# Altium PCB LDO.PcbDoc
Units mil, origin at the board's own origin, x right, y up, seen from the top; angles counter-clockwise.
Board outline 6000 x 4000 mil, 2 copper layers (Top Layer, Bottom Layer); 46 components, 25 nets, 207 pads, 11 vias.
Unrouted connection lines stored in the file: 2.
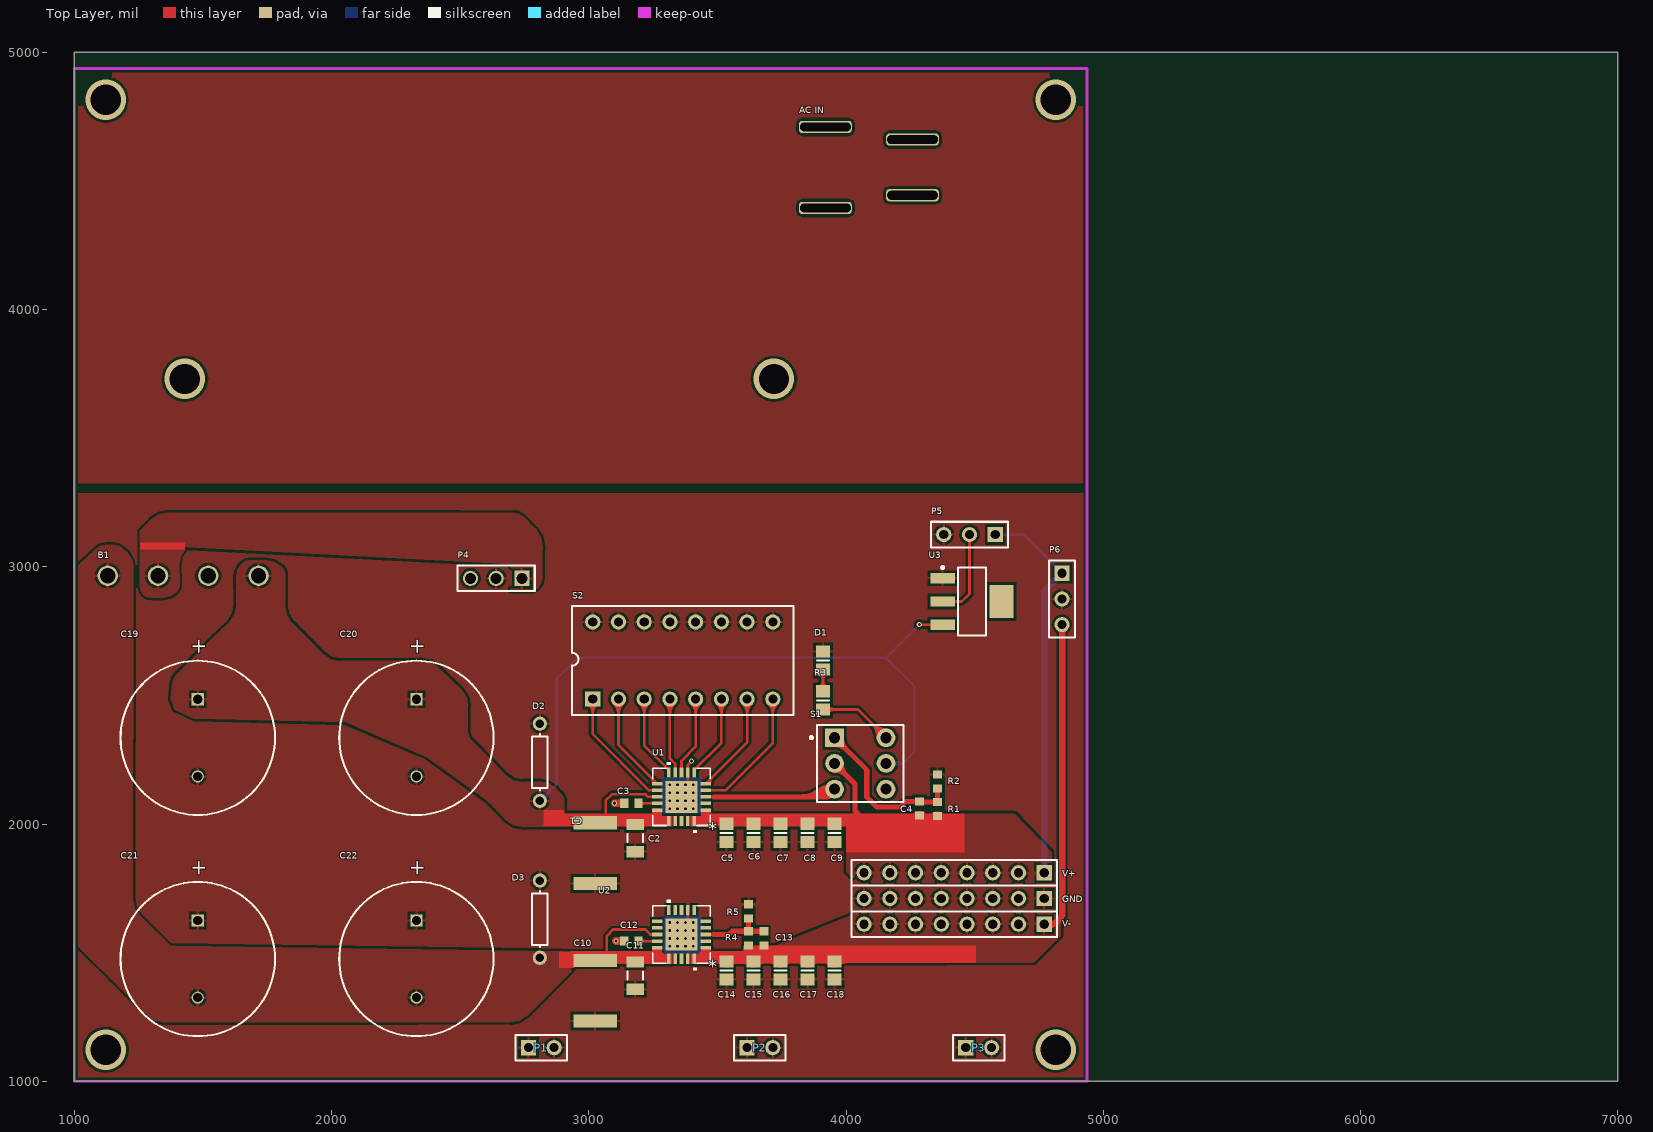
[diagram p0: Top Layer view]
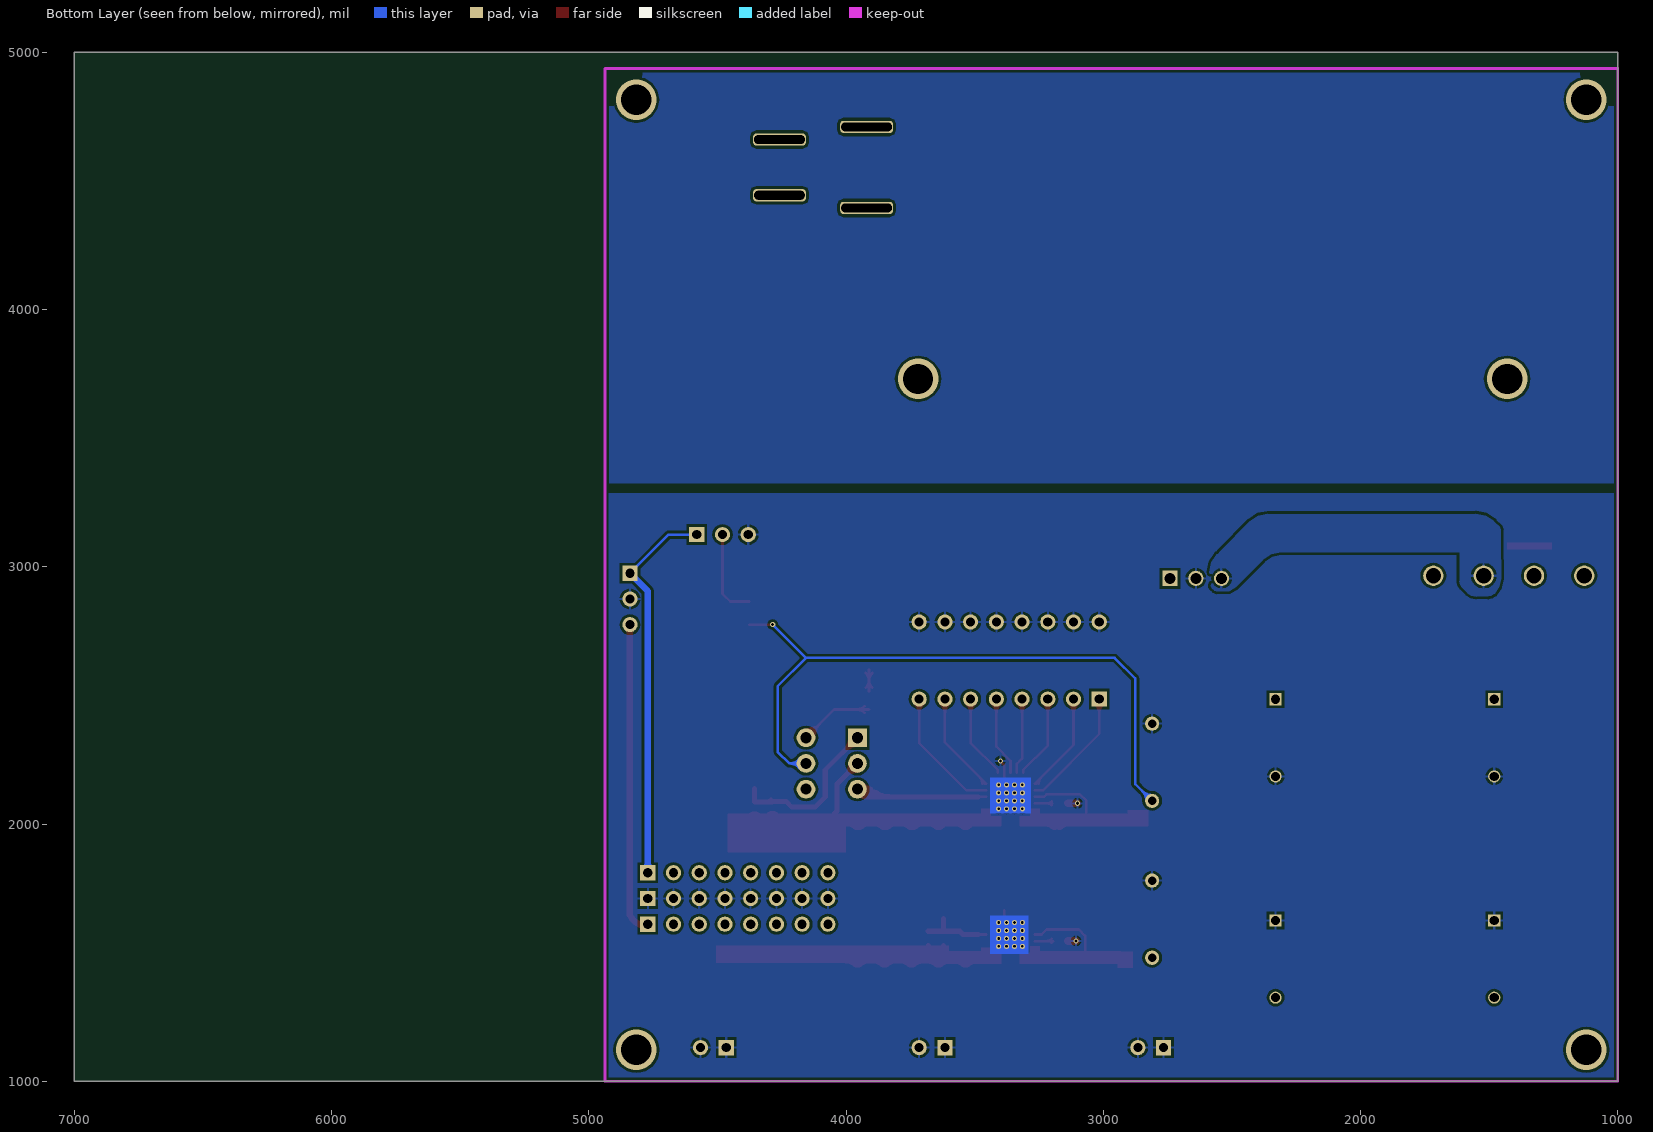
[diagram p1: Bottom Layer view, seen from below]

## Layer stack, top to bottom
Top Layer: signal copper 1.4
Dielectric: dielectric 12.6, FR-4, Dk 4.8
Bottom Layer: signal copper 1.4

## Board outline
1000,1000 7000,1000 7000,5000 1000,5000

## Design rules (kind name [scope] priority, off if disabled: settings)
Clearance [All] p1: gap=10
PolygonConnect [All] p1: connectstyle=Relief reliefconductorwidth=10 reliefentries=4 polygonreliefangle="90 Angle" airgapwidth=10
RoutingVias [All] p1: holewidth=28 width=50 viastyle="Through Hole" minholewidth=28 minwidth=50 maxholewidth=28 maxwidth=50
SolderMaskExpansion [All] p1: expansion=4
Width [All] p1: maxlimit=10 minlimit=10 preferedwidth=10
28 further rules are at their usual default settings.

## Components (designator, comment, footprint, x,y, rotation, side; value= is the part's Value field where it differs from the comment)
"AC IN" "SW AC 250V 6A" "SW AC 250V 6A" 3920,4710 r0 top
B1 "Diode Bridge" "Diode Bridge" 1130,2965 r0 top
C1 "Tantalum" "D 7343-31" 3025,2005 r270 top
C2 "X5R 50V" C1206 3180.5,1945.5 r90 top
C3 "X5R 50V" 1608[0603] 3165.5,2080.5 r0 top
C4 "X7R 25V" 1608[0603] 4285.5,2060.5 r270 top
C5 "X5R 35V" 6-0805_N 3535.5,1965.5 r90 top
C6 "X5R 35V" 6-0805_N 3640.5,1965.5 r90 top
C7 "X5R 35V" 6-0805_N 3745.5,1965.5 r90 top
C8 "X5R 35V" 6-0805_N 3850.5,1965.5 r90 top
C9 "X5R 35V" 6-0805_N 3955.5,1965.5 r90 top
C10 "Tantalum" "D 7343-31" 3025,1470 r270 top
C11 "X5R 50V" C1206 3180.5,1410.5 r90 top
C12 "X5R 50V" 1608[0603] 3165.5,1545.5 r0 top
C13 "X7R 25V" 1608[0603] 3680.5,1555.5 r270 top
C14 "X5R 35V" 6-0805_N 3535.5,1430.5 r90 top
C15 "X5R 35V" 6-0805_N 3640.5,1430.5 r90 top
C16 "X5R 35V" 6-0805_N 3745.5,1430.5 r90 top
C17 "X5R 35V" 6-0805_N 3850.5,1430.5 r90 top
C18 "X5R 35V" 6-0805_N 3955.5,1430.5 r90 top
C19 "Cap Pol1" RB7.6-15 1480,2335 r90 top
C20 "Cap Pol1" RB7.6-15 2330,2335 r90 top
C21 "Cap Pol1" RB7.6-15 1480,1475 r90 top
C22 "Cap Pol1" RB7.6-15 2330,1475 r90 top
D1 "LED2" 6-0805_N 3910.5,2635.5 r90 top
D2 "D Zener" AXIAL-0.3 2810,2240 r270 top
D3 "D Zener" AXIAL-0.3 2810,1630 r90 top
GND "Header 8" HDR1X8 4770.5,1710.5 r180 top
P1 "Header 2" HDR1X2 2765.5,1130.5 r0 top
P2 "Header 2" HDR1X2 3615.5,1130.5 r0 top
P3 "Header 2" HDR1X2 4465.5,1130.5 r0 top
P4 "Header 3" HDR1X3#1 2740,2955 r180 top
P5 "Header 3" HDR1X3#2 4580,3125 r180 top
P6 "Header 3" HDR1X3#2 4840,2975 r270 top
R1 "1/10W 1%" 1608[0603] 4355.5,2057.94 r270 top
R2 "1/10W 1%" 1608[0603] 4355.5,2165.5 r270 top
R3 "Res1" 6-0805_N 3910.5,2480.5 r270 top
R4 "1/10W 1%" 1608[0603] 3620.5,1555.5 r270 top
R5 "1/10W 1%" 1608[0603] 3620.5,1660.5 r270 top
S1 "SW  Press" "SW Press" 4055.5,2235.5 r0 top
S2 "SW-DIP8" DIP-16-KEY 3015.5,2485.5 r0 top
U1 "TPS7A4701" "RGW 5×5 QFN-20" 3360.5,2105.5 r180 top
U2 "TPS7A3301" "RGW 5×5 QFN-20" 3360.5,1570.5 r180 top
U3 "AMS1117" SOT223_N 4490,2865 r0 top
V+ "Header 8" HDR1X8 4770.5,1810.5 r180 top
V- "Header 8" HDR1X8 4770.5,1610.5 r180 top

## Footprints (in the part's own frame and the unit in brackets; to place one, negate y for a bottom-side part, rotate by r counter-clockwise, add the part's x,y. Pads: shape width x height; smd on the part's side, far side on the other; paste and mask are expansions set on the pad)
6-0805_N [mm] "Chip Resistor, Body 2.0x1.2mm, IPC Medium Density"
  rect 1.2x1.4 smd: 1(-0.9,0) 2(0.9,0)
  silkscreen extent 0,-0.6 0,0.6, body extent -1.07,-0.7 1.07,0.7, height 0.7
1608[0603] [mm] "Chip Capacitor, Body 1.6x0.8mm, IPC High Density"
  rect 0.8x0.9 smd: 1(-0.7,0) 2(0.7,0)
  body extent -0.87,-0.48 0.87,0.48, height 1.3
AXIAL-0.3 [mm] "Axial Device, Thru-Hole; 2 Leads; 0.3 in Pin Spacing"
  round 1.4 hole 0.85: 1(-3.81,0) 2(3.81,0)
  silkscreen extent -2.77,-0.76 2.77,0.76
C1206 [mm] "Chip Capacitor, Body 3.2x1.6mm, IPC High Density"
  rect 1.1x1.7 smd: 1(-1.35,0) 2(1.35,0)
  silkscreen extent -0.4,-0.75 0.4,0.75, body extent -1.7,-0.9 1.7,0.9, height 1.3
"D 7343-31" [mm]
  rect 1.3x4.3 smd: 1(0,0) 2(6,0)
"Diode Bridge" [mm]
  round 2 hole 1.5: 1(0,0) 2(4.96,0) 3(9.93,0) 4(14.9,0)
DIP-16-KEY [mm] "DIP; 16 Leads; Row Spacing 7.62 mm; Pitch 2.54 mm"
  rect 1.5x1.5 hole 0.9: 1(0,0)
  round 1.5 hole 0.9: 2(2.54,0) 3(5.08,0) 4(7.62,0) 5(10.16,0) 6(12.7,0) 7(15.24,0) 8(17.78,0) 9(17.78,7.62) 10(15.24,7.62) 11(12.7,7.62) 12(10.16,7.62) 13(7.62,7.62) 14(5.08,7.62) 15(2.54,7.62) 16(0,7.62)
  silkscreen extent -2.05,-1.59 19.83,9.2
HDR1X2 [mm] "Connector; Header; 2 Position"
  rect 1.5x1.5 hole 0.9: 1(0,0)
  round 1.5 hole 0.9: 2(2.54,0)
  silkscreen extent -1.27,-1.27 3.81,1.27
HDR1X3#1 [mm] "Connector; Header; 3 Position"
  rect 1.5x1.5 hole 1.1: 1(0,0)
  round 1.5 hole 1.1: 2(2.54,0) 3(5.08,0)
  silkscreen extent -1.27,-1.27 6.35,1.27
HDR1X3#2 [mm] "Connector; Header; 3 Position"
  rect 1.5x1.5 hole 0.9: 1(0,0)
  round 1.5 hole 0.9: 2(2.54,0) 3(5.08,0)
  silkscreen extent -1.27,-1.27 6.35,1.27
HDR1X8 [mm] "Connector; Header; 8 Position"
  rect 1.5x1.5 hole 0.9: 1(0,0)
  round 1.5 hole 0.9: 2(2.54,0) 3(5.08,0) 4(7.62,0) 5(10.16,0) 6(12.7,0) 7(15.24,0) 8(17.78,0)
  silkscreen extent -1.27,-1.27 19.05,1.27
RB7.6-15 [mm] "Polarized Capacitor (Radial); 2 Leads"
  rect 1.2x1.2 hole 0.9: 1(3.81,0)
  round 1.2 hole 0.9: 2(-3.81,0)
  silkscreen extent -7.62,-7.62 7.62,7.62
"RGW 5×5 QFN-20" [mil]
  rect 39.37x13.78 smd paste-6.89: 1(-94.49,51.18) 2(-94.49,25.59) 3(-94.49,0) 4(-94.49,-25.59) 5(-94.49,-51.18) 11(94.49,-51.18) 12(94.49,-25.59) 13(94.49,0) 14(94.49,25.59) 15(94.49,51.18)
  rect 13.78x39.37 smd paste-6.89: 6(-49.38,-94.49) 7(-24.69,-94.49) 8(0,-94.49) 9(24.69,-94.49) 10(49.38,-94.49) 16(49.38,94.49) 17(24.69,94.49) 18(0,94.49) 19(-24.69,94.49) 20(-49.38,94.49)
  rect 124.02x124.02 smd paste-62.01: 21(0,0)
  round 20 / inner round 60 / far side round 20 hole 10: V(46.5,46.5) V_2(-46.5,-15.5) V_3(-46.5,-46.5) V_4(-46.5,15.5) V_5(-46.5,46.5) V_6(-15.5,-46.5) V_7(-15.5,-15.5) V_8(-15.5,15.5) V_9(-15.5,46.5) V_10(15.5,-46.5) V_11(15.5,-15.5) V_12(15.5,15.5) V_13(15.5,46.5) V_14(46.5,-46.5) V_15(46.5,-15.5) V_16(46.5,15.5)
  silkscreen extent -111,-134 111,140
SOT223_N [mm]
  rect 2.4x1 smd: 1(-2.9,2.3) 2(-2.9,0) 3(-2.9,-2.3)
  rect 2.4x3.3 smd: 4(2.9,0)
  silkscreen extent -3.02,-3.35 1.4,3.47, body extent -1.85,-3.35 1.85,3.35, height 1.7
"SW AC 250V 6A" [mm]
  rrect50% 5.2x1.2 hole 0.862 slot 5 at 0 deg: 1(0,0) 2(0,-8) 3(8.6,-6.75) 4(8.6,-1.25)
"SW Press" [mm]
  rect 1.85x1.85 hole 1.1: 1(-2.54,2.54)
  round 1.85 hole 1.1: 2(-2.54,0) 3(-2.54,-2.54) 4(2.54,-2.54) 5(2.54,0) 6(2.54,2.54)
  silkscreen extent -4.96,-3.81 4.28,3.81

## Part data
C2 C11: library part "Cap Semi", "Capacitor (Semiconductor SIM Model)"
C3 C4 C5 C6 C7 C8 C9 C12 C13 C14 C15 C16 C17 C18: library part Cap, "Capacitor"
C19 C20 C21 C22: "Polarized Capacitor (Radial)"
D1: "Typical RED, GREEN, YELLOW, AMBER GaAs LED"
D2 D3: "Zener Diode"
GND V+ V-: "Header, 8-Pin"
P1 P2 P3: "Header, 2-Pin"
P4 P5 P6: "Header, 3-Pin"
R1 R2 R4 R5: library part Res1, "Resistor"
R3: "Resistor"
S2: "4009 Series DIP Switch, Raised actuator"
U1: library part TPS7A4701RGWT
U2: library part TPS7A3301RGWT

## Via types
v1: diameter 157.48, hole 118.11, Top Layer to Bottom Layer, 6 vias
v2: diameter 20, hole 12, Top Layer to Bottom Layer, 5 vias

## Nets (pads, with @x,y where several pads share a name; then routed paths per layer and width w, separated by ;. In a path a pad name is that pad's centre, name@x,y a point inside that pad or via, vN(x,y) a via of type N, cw(c..) or ccw(c..) an arc to the next point about the centre after c; other vN are vias at no path point)
0P1V: S2.1 U1.12 | length 1068.8
  Top Layer w10: S2.1 3015.5,2350.5 3234.91,2131.09 U1.12 ; S2.1@2998.16,2468.16 cw(c2956.29,2426.29) 3015.5,2426.29 ; S2.1@2998.16,2468.16 cw(c2956.29,2426.29) 3015.5,2426.29 ; S2.1@2998.16,2468.16 cw(c2956.29,2426.29) 3015.5,2426.29 ; S2.1@2998.16,2468.16 cw(c2956.29,2426.29) 3015.5,2426.29 ; S2.1@3005.23,2475.23 cw(c2980.43,2450.43) 3015.5,2450.43 ; S2.1@3005.23,2475.23 cw(c2980.43,2450.43) 3015.5,2450.43 ; S2.1@3005.23,2475.23 cw(c2980.43,2450.43) 3015.5,2450.43 ; S2.1@3005.23,2475.23 cw(c2980.43,2450.43) 3015.5,2450.43 ; 3015.5,2426.29 cw(c3074.71,2426.29) S2.1@3032.84,2468.16 ; 3015.5,2426.29 cw(c3074.71,2426.29) S2.1@3032.84,2468.16 ; 3015.5,2426.29 cw(c3074.71,2426.29) S2.1@3032.84,2468.16 ; 3015.5,2426.29 cw(c3074.71,2426.29) S2.1@3032.84,2468.16 ; 3015.5,2450.43 cw(c3050.57,2450.43) S2.1@3025.77,2475.23 ; 3015.5,2450.43 cw(c3050.57,2450.43) S2.1@3025.77,2475.23 ; 3015.5,2450.43 cw(c3050.57,2450.43) S2.1@3025.77,2475.23 ; 3015.5,2450.43 cw(c3050.57,2450.43) S2.1@3025.77,2475.23
0P2V: S2.2 U1.11 | length 1181.4
  Top Layer w10: S2.2 3115.5,2307.19 U1.11 ; S2.2@3098.16,2468.16 cw(c3056.29,2426.29) 3115.5,2426.29 ; S2.2@3098.16,2468.16 cw(c3056.29,2426.29) 3115.5,2426.29 ; S2.2@3098.16,2468.16 cw(c3056.29,2426.29) 3115.5,2426.29 ; S2.2@3098.16,2468.16 cw(c3056.29,2426.29) 3115.5,2426.29 ; S2.2@3105.23,2475.23 cw(c3080.43,2450.43) 3115.5,2450.43 ; S2.2@3105.23,2475.23 cw(c3080.43,2450.43) 3115.5,2450.43 ; S2.2@3105.23,2475.23 cw(c3080.43,2450.43) 3115.5,2450.43 ; S2.2@3105.23,2475.23 cw(c3080.43,2450.43) 3115.5,2450.43 ; 3115.5,2426.29 cw(c3174.71,2426.29) S2.2@3132.84,2468.16 ; 3115.5,2426.29 cw(c3174.71,2426.29) S2.2@3132.84,2468.16 ; 3115.5,2426.29 cw(c3174.71,2426.29) S2.2@3132.84,2468.16 ; 3115.5,2426.29 cw(c3174.71,2426.29) S2.2@3132.84,2468.16 ; 3115.5,2450.43 cw(c3150.57,2450.43) S2.2@3125.77,2475.23 ; 3115.5,2450.43 cw(c3150.57,2450.43) S2.2@3125.77,2475.23 ; 3115.5,2450.43 cw(c3150.57,2450.43) S2.2@3125.77,2475.23 ; 3115.5,2450.43 cw(c3150.57,2450.43) S2.2@3125.77,2475.23 ; 3240.94,2181.75 cw(c3215.87,2156.68) U1.11@3251.33,2156.68 ; 3240.94,2181.75 cw(c3215.87,2156.68) U1.11@3251.33,2156.68 ; 3240.94,2181.75 cw(c3215.87,2156.68) U1.11@3251.33,2156.68 ; 3240.94,2181.75 cw(c3215.87,2156.68) U1.11@3251.33,2156.68 ; 3249.13,2164.87 ccw(c3259.56,2167.67) U1.11@3254.16,2158.32 ; 3249.13,2164.87 ccw(c3259.56,2167.67) U1.11@3254.16,2158.32 ; 3249.13,2164.87 ccw(c3259.56,2167.67) U1.11@3254.16,2158.32 ; 3249.13,2164.87 ccw(c3259.56,2167.67) U1.11@3254.16,2158.32 ; 3249.13,2164.87 ccw(c3259.56,2167.67) U1.11@3254.16,2158.32 ; 3249.13,2164.87 ccw(c3259.56,2167.67) U1.11@3254.16,2158.32 ; 3258.01,2164.68 cw(c3250.02,2156.68) U1.11@3261.33,2156.68 ; 3258.01,2164.68 cw(c3250.02,2156.68) U1.11@3261.33,2156.68 ; 3258.01,2164.68 cw(c3250.02,2156.68) U1.11@3261.33,2156.68 ; 3258.01,2164.68 cw(c3250.02,2156.68) U1.11@3261.33,2156.68
0P4V: S2.3 U1.10 | length 917.5
  Top Layer w10: S2.3 3215.5,2305.61 3311.12,2209.99 U1.10 ; S2.3@3198.16,2468.16 cw(c3156.29,2426.29) 3215.5,2426.29 ; S2.3@3198.16,2468.16 cw(c3156.29,2426.29) 3215.5,2426.29 ; S2.3@3198.16,2468.16 cw(c3156.29,2426.29) 3215.5,2426.29 ; S2.3@3198.16,2468.16 cw(c3156.29,2426.29) 3215.5,2426.29 ; S2.3@3205.23,2475.23 cw(c3180.43,2450.43) 3215.5,2450.43 ; S2.3@3205.23,2475.23 cw(c3180.43,2450.43) 3215.5,2450.43 ; S2.3@3205.23,2475.23 cw(c3180.43,2450.43) 3215.5,2450.43 ; S2.3@3205.23,2475.23 cw(c3180.43,2450.43) 3215.5,2450.43 ; 3215.5,2426.29 cw(c3274.71,2426.29) S2.3@3232.84,2468.16 ; 3215.5,2426.29 cw(c3274.71,2426.29) S2.3@3232.84,2468.16 ; 3215.5,2426.29 cw(c3274.71,2426.29) S2.3@3232.84,2468.16 ; 3215.5,2426.29 cw(c3274.71,2426.29) S2.3@3232.84,2468.16 ; 3215.5,2450.43 cw(c3250.57,2450.43) S2.3@3225.77,2475.23 ; 3215.5,2450.43 cw(c3250.57,2450.43) S2.3@3225.77,2475.23 ; 3215.5,2450.43 cw(c3250.57,2450.43) S2.3@3225.77,2475.23 ; 3215.5,2450.43 cw(c3250.57,2450.43) S2.3@3225.77,2475.23
0P8V: S2.4 U1.9 | length 886.3
  Top Layer w10: S2.4 3315.5,2254.5 3335.81,2234.19 U1.9 ; S2.4@3298.16,2468.16 cw(c3256.29,2426.29) 3315.5,2426.29 ; S2.4@3298.16,2468.16 cw(c3256.29,2426.29) 3315.5,2426.29 ; S2.4@3298.16,2468.16 cw(c3256.29,2426.29) 3315.5,2426.29 ; S2.4@3298.16,2468.16 cw(c3256.29,2426.29) 3315.5,2426.29 ; S2.4@3305.23,2475.23 cw(c3280.43,2450.43) 3315.5,2450.43 ; S2.4@3305.23,2475.23 cw(c3280.43,2450.43) 3315.5,2450.43 ; S2.4@3305.23,2475.23 cw(c3280.43,2450.43) 3315.5,2450.43 ; S2.4@3305.23,2475.23 cw(c3280.43,2450.43) 3315.5,2450.43 ; 3315.5,2426.29 cw(c3374.71,2426.29) S2.4@3332.84,2468.16 ; 3315.5,2426.29 cw(c3374.71,2426.29) S2.4@3332.84,2468.16 ; 3315.5,2426.29 cw(c3374.71,2426.29) S2.4@3332.84,2468.16 ; 3315.5,2426.29 cw(c3374.71,2426.29) S2.4@3332.84,2468.16 ; 3315.5,2450.43 cw(c3350.57,2450.43) S2.4@3325.77,2475.23 ; 3315.5,2450.43 cw(c3350.57,2450.43) S2.4@3325.77,2475.23 ; 3315.5,2450.43 cw(c3350.57,2450.43) S2.4@3325.77,2475.23 ; 3315.5,2450.43 cw(c3350.57,2450.43) S2.4@3325.77,2475.23
1P6V: S2.5 U1.8 | length 900.7
  Top Layer w10: U1.8 3360.5,2245.5 3415.5,2300.5 S2.5 ; S2.5@3398.16,2468.16 cw(c3356.29,2426.29) 3415.5,2426.29 ; S2.5@3398.16,2468.16 cw(c3356.29,2426.29) 3415.5,2426.29 ; S2.5@3398.16,2468.16 cw(c3356.29,2426.29) 3415.5,2426.29 ; S2.5@3398.16,2468.16 cw(c3356.29,2426.29) 3415.5,2426.29 ; S2.5@3405.23,2475.23 cw(c3380.43,2450.43) 3415.5,2450.43 ; S2.5@3405.23,2475.23 cw(c3380.43,2450.43) 3415.5,2450.43 ; S2.5@3405.23,2475.23 cw(c3380.43,2450.43) 3415.5,2450.43 ; S2.5@3405.23,2475.23 cw(c3380.43,2450.43) 3415.5,2450.43 ; 3415.5,2426.29 cw(c3474.71,2426.29) S2.5@3432.84,2468.16 ; 3415.5,2426.29 cw(c3474.71,2426.29) S2.5@3432.84,2468.16 ; 3415.5,2426.29 cw(c3474.71,2426.29) S2.5@3432.84,2468.16 ; 3415.5,2426.29 cw(c3474.71,2426.29) S2.5@3432.84,2468.16 ; 3415.5,2450.43 cw(c3450.57,2450.43) S2.5@3425.77,2475.23 ; 3415.5,2450.43 cw(c3450.57,2450.43) S2.5@3425.77,2475.23 ; 3415.5,2450.43 cw(c3450.57,2450.43) S2.5@3425.77,2475.23 ; 3415.5,2450.43 cw(c3450.57,2450.43) S2.5@3425.77,2475.23
3P2V: S2.6 U1.6 | length 921.7
  Top Layer w10: U1.6 3409.88,2209.99 3515.5,2315.61 S2.6 ; S2.6@3498.16,2468.16 cw(c3456.29,2426.29) 3515.5,2426.29 ; S2.6@3498.16,2468.16 cw(c3456.29,2426.29) 3515.5,2426.29 ; S2.6@3498.16,2468.16 cw(c3456.29,2426.29) 3515.5,2426.29 ; S2.6@3498.16,2468.16 cw(c3456.29,2426.29) 3515.5,2426.29 ; S2.6@3505.23,2475.23 cw(c3480.43,2450.43) 3515.5,2450.43 ; S2.6@3505.23,2475.23 cw(c3480.43,2450.43) 3515.5,2450.43 ; S2.6@3505.23,2475.23 cw(c3480.43,2450.43) 3515.5,2450.43 ; S2.6@3505.23,2475.23 cw(c3480.43,2450.43) 3515.5,2450.43 ; 3515.5,2426.29 cw(c3574.71,2426.29) S2.6@3532.84,2468.16 ; 3515.5,2426.29 cw(c3574.71,2426.29) S2.6@3532.84,2468.16 ; 3515.5,2426.29 cw(c3574.71,2426.29) S2.6@3532.84,2468.16 ; 3515.5,2426.29 cw(c3574.71,2426.29) S2.6@3532.84,2468.16 ; 3515.5,2450.43 cw(c3550.57,2450.43) S2.6@3525.77,2475.23 ; 3515.5,2450.43 cw(c3550.57,2450.43) S2.6@3525.77,2475.23 ; 3515.5,2450.43 cw(c3550.57,2450.43) S2.6@3525.77,2475.23 ; 3515.5,2450.43 cw(c3550.57,2450.43) S2.6@3525.77,2475.23
6P4V1: S2.7 U1.5 | length 1185.5
  Top Layer w10: U1.5 3615.5,2317.19 S2.7 ; U1.5@3459.67,2156.68 cw(c3470.98,2156.68) 3462.99,2164.68 ; U1.5@3459.67,2156.68 cw(c3470.98,2156.68) 3462.99,2164.68 ; U1.5@3459.67,2156.68 cw(c3470.98,2156.68) 3462.99,2164.68 ; U1.5@3459.67,2156.68 cw(c3470.98,2156.68) 3462.99,2164.68 ; U1.5@3466.84,2158.32 ccw(c3461.44,2167.67) 3471.87,2164.87 ; U1.5@3466.84,2158.32 ccw(c3461.44,2167.67) 3471.87,2164.87 ; U1.5@3466.84,2158.32 ccw(c3461.44,2167.67) 3471.87,2164.87 ; U1.5@3466.84,2158.32 ccw(c3461.44,2167.67) 3471.87,2164.87 ; U1.5@3466.84,2158.32 ccw(c3461.44,2167.67) 3471.87,2164.87 ; U1.5@3466.84,2158.32 ccw(c3461.44,2167.67) 3471.87,2164.87 ; U1.5@3469.67,2156.68 cw(c3505.13,2156.68) 3480.06,2181.75 ; U1.5@3469.67,2156.68 cw(c3505.13,2156.68) 3480.06,2181.75 ; U1.5@3469.67,2156.68 cw(c3505.13,2156.68) 3480.06,2181.75 ; U1.5@3469.67,2156.68 cw(c3505.13,2156.68) 3480.06,2181.75 ; S2.7@3598.16,2468.16 cw(c3556.29,2426.29) 3615.5,2426.29 ; S2.7@3598.16,2468.16 cw(c3556.29,2426.29) 3615.5,2426.29 ; S2.7@3598.16,2468.16 cw(c3556.29,2426.29) 3615.5,2426.29 ; S2.7@3598.16,2468.16 cw(c3556.29,2426.29) 3615.5,2426.29 ; S2.7@3605.23,2475.23 cw(c3580.43,2450.43) 3615.5,2450.43 ; S2.7@3605.23,2475.23 cw(c3580.43,2450.43) 3615.5,2450.43 ; S2.7@3605.23,2475.23 cw(c3580.43,2450.43) 3615.5,2450.43 ; S2.7@3605.23,2475.23 cw(c3580.43,2450.43) 3615.5,2450.43 ; 3615.5,2426.29 cw(c3674.71,2426.29) S2.7@3632.84,2468.16 ; 3615.5,2426.29 cw(c3674.71,2426.29) S2.7@3632.84,2468.16 ; 3615.5,2426.29 cw(c3674.71,2426.29) S2.7@3632.84,2468.16 ; 3615.5,2426.29 cw(c3674.71,2426.29) S2.7@3632.84,2468.16 ; 3615.5,2450.43 cw(c3650.57,2450.43) S2.7@3625.77,2475.23 ; 3615.5,2450.43 cw(c3650.57,2450.43) S2.7@3625.77,2475.23 ; 3615.5,2450.43 cw(c3650.57,2450.43) S2.7@3625.77,2475.23 ; 3615.5,2450.43 cw(c3650.57,2450.43) S2.7@3625.77,2475.23
6P4V2: S2.8 U1.4 | length 1099.3
  Top Layer w10: U1.4 3531.09,2131.09 3715.5,2315.5 S2.8 ; S2.8@3698.16,2468.16 cw(c3656.29,2426.29) 3715.5,2426.29 ; S2.8@3698.16,2468.16 cw(c3656.29,2426.29) 3715.5,2426.29 ; S2.8@3698.16,2468.16 cw(c3656.29,2426.29) 3715.5,2426.29 ; S2.8@3698.16,2468.16 cw(c3656.29,2426.29) 3715.5,2426.29 ; S2.8@3705.23,2475.23 cw(c3680.43,2450.43) 3715.5,2450.43 ; S2.8@3705.23,2475.23 cw(c3680.43,2450.43) 3715.5,2450.43 ; S2.8@3705.23,2475.23 cw(c3680.43,2450.43) 3715.5,2450.43 ; S2.8@3705.23,2475.23 cw(c3680.43,2450.43) 3715.5,2450.43 ; 3715.5,2426.29 cw(c3774.71,2426.29) S2.8@3732.84,2468.16 ; 3715.5,2426.29 cw(c3774.71,2426.29) S2.8@3732.84,2468.16 ; 3715.5,2426.29 cw(c3774.71,2426.29) S2.8@3732.84,2468.16 ; 3715.5,2426.29 cw(c3774.71,2426.29) S2.8@3732.84,2468.16 ; 3715.5,2450.43 cw(c3750.57,2450.43) S2.8@3725.77,2475.23 ; 3715.5,2450.43 cw(c3750.57,2450.43) S2.8@3725.77,2475.23 ; 3715.5,2450.43 cw(c3750.57,2450.43) S2.8@3725.77,2475.23 ; 3715.5,2450.43 cw(c3750.57,2450.43) S2.8@3725.77,2475.23
FB: C13.1 R4.1 R5.2 U2.3 | length 280.6
  Top Layer w10: U2.3 3485.5,1570.5
  Top Layer w20: 3485.5,1570.5 3545.5,1570.5 3558.06,1583.06 R4.1 ; R5.2 R4.1 ; C13.1 R4.1
GND: C1.2 C2.1 C3.1 C5.1 C6.1 C7.1 C8.1 C9.1 C10.2 C11.1 C12.1 C14.1 C15.1 C16.1 C17.1 C18.1 C19.2 C20.2 C21.1 C22.1 D1.2 D2.1 D3.2 GND.1 GND.2 GND.3 GND.4 GND.5 GND.6 GND.7 GND.8 P1.1 P1.2 P2.1 P2.2 P3.1 P3.2 P4.2 P5.3 P6.2 R2.1 R5.1 S2.9 S2.10 S2.11 S2.12 S2.13 S2.14 S2.15 S2.16 U1.7 U1.21 U2.7 U2.21 U3.1 | length 330.5
  Top Layer w10: U2.21 3360.5,1605.5 3385.19,1630.19 U2.7 ; U1.21 3360.5,2140.5 3385.19,2165.19 U1.7 3385.19,2230.19 v2(3400,2245)
  Top Layer w30: v2(3100.5,2080.5) C3.1 ; v2(3105.5,1545.5) C12.1
NetB1_2: B1.2 P4.1
NetB1_3: B1.3 P4.3
NetC3_2: C3.2 U1.14 | length 230.5
  Top Layer w10: C3.2@3198.53,2079.91 U1.14 ; C3.2@3200.66,2072.9 cw(c3217.58,2055.98) 3217.58,2079.91 ; C3.2@3200.66,2072.9 cw(c3217.58,2055.98) 3217.58,2079.91 ; C3.2@3200.66,2072.9 cw(c3217.58,2055.98) 3217.58,2079.91 ; C3.2@3200.66,2072.9 cw(c3217.58,2055.98) 3217.58,2079.91 ; C3.2@3200.66,2088.1 ccw(c3220.43,2107.87) 3220.43,2079.91 ; C3.2@3200.66,2088.1 ccw(c3220.43,2107.87) 3220.43,2079.91 ; C3.2@3200.66,2088.1 ccw(c3220.43,2107.87) 3220.43,2079.91 ; C3.2@3200.66,2088.1 ccw(c3220.43,2107.87) 3220.43,2079.91
NetC4_1: C4.1 R1.1 R2.2 S1.1 | length 1104.3
  Top Layer w20: S1.1 4080.5,2210.5 4080.5,2105.5 4120.5,2065.5 4210.5,2065.5 4233.06,2088.06 C4.1 ; C4.1@4288.06,2085.5 R1.1 R2.2 ; S1.1@3955.5,2309.08 cw(c3955.5,2245.31) 4000.6,2290.4 ; S1.1@3955.5,2309.08 cw(c3955.5,2245.31) 4000.6,2290.4 ; S1.1@3955.5,2309.08 cw(c3955.5,2245.31) 4000.6,2290.4 ; S1.1@3955.5,2309.08 cw(c3955.5,2245.31) 4000.6,2290.4 ; S1.1@3981.92,2335.5 ccw(c4045.69,2335.5) 4000.6,2290.4 ; S1.1@3981.92,2335.5 ccw(c4045.69,2335.5) 4000.6,2290.4 ; S1.1@3981.92,2335.5 ccw(c4045.69,2335.5) 4000.6,2290.4 ; S1.1@3981.92,2335.5 ccw(c4045.69,2335.5) 4000.6,2290.4 ; C4.1@4291.53,2092.12 ccw(c4307.52,2108.11) 4307.52,2085.5 ; C4.1@4291.53,2092.12 ccw(c4307.52,2108.11) 4307.52,2085.5 ; C4.1@4291.53,2092.12 ccw(c4307.52,2108.11) 4307.52,2085.5 ; C4.1@4291.53,2092.12 ccw(c4307.52,2108.11) 4307.52,2085.5
NetC10_1: C10.1 C11.2 U2.13 U2.15 U2.16 | length 614.3
  Top Layer w10: 3070.29,1500 3070.29,1565.29 3095,1590 3220,1590 3239.5,1570.5 U2.13
  Top Layer w50: 2935.5,1480.5 3270.5,1480.5
NetC12_2: C12.2 U2.14 | length 113.1
  Top Layer w10: C12.2@3193.65,1544.91 U2.14 ; C12.2@3200.66,1537.9 cw(c3217.58,1520.98) 3217.58,1544.91 ; C12.2@3200.66,1553.1 ccw(c3220.43,1572.87) 3220.43,1544.91
NetD1_1: D1.1 R3.1 | length 507.8
  Top Layer w10: R3.1 D1.1 ; R3.1@3897.33,2529.1 ccw(c3865.54,2560.89) 3910.5,2560.89 ; R3.1@3897.33,2529.1 ccw(c3865.54,2560.89) 3910.5,2560.89 ; R3.1@3897.33,2529.1 ccw(c3865.54,2560.89) 3910.5,2560.89 ; D1.1@3897.33,2586.9 cw(c3865.54,2555.11) 3910.5,2555.11 ; D1.1@3897.33,2586.9 cw(c3865.54,2555.11) 3910.5,2555.11 ; D1.1@3897.33,2586.9 cw(c3865.54,2555.11) 3910.5,2555.11 ; 3910.5,2555.11 cw(c3955.46,2555.11) D1.1@3923.67,2586.9 ; 3910.5,2555.11 cw(c3955.46,2555.11) D1.1@3923.67,2586.9 ; 3910.5,2555.11 cw(c3955.46,2555.11) D1.1@3923.67,2586.9 ; 3910.5,2560.89 ccw(c3955.46,2560.89) R3.1@3923.67,2529.1 ; 3910.5,2560.89 ccw(c3955.46,2560.89) R3.1@3923.67,2529.1 ; 3910.5,2560.89 ccw(c3955.46,2560.89) R3.1@3923.67,2529.1
NetP5_2: P5.2 U3.2 U3.4 | length 346.6
  Top Layer w10: U3.2 4450,2865 4480,2895 P5.2
NetR3_2: R3.2 S1.6 | length 3886.3
  Top Layer w10: R3.2 4045.93,2445.07 S1.6 ; 4116,2372.66 cw(c4103.93,2322.26) 4154.13,2335.15 ccw(c4104.14,2322.47) 4116.2,2372.61 ; 4118.34,2375 ccw(c4168.74,2387.07) 4155.85,2336.87 cw(c4168.53,2386.86) 4118.39,2374.8 ; 4122.21,2358.85 ccw(c4164.07,2368.88) S1.6@4153.37,2327.19 ; 4122.26,2358.69 ccw(c4163.92,2368.72) S1.6@4153.39,2327.18 ; S1.6@4125.52,2344.91 ccw(c4099.68,2353.01) 4118.94,2372.06 ; S1.6@4125.61,2345.16 ccw(c4100.61,2353.24) 4119.08,2371.92 ; 4132.15,2368.79 cw(c4122.12,2326.93) S1.6@4163.81,2337.63 ; 4132.31,2368.74 cw(c4122.28,2327.08) S1.6@4163.82,2337.61 ; S1.6@4145.84,2365.39 cw(c4137.76,2390.39) 4119.08,2371.92 ; S1.6@4146.09,2365.48 cw(c4137.99,2391.32) 4118.94,2372.06 ; R3.2@3927.6,2431.9 cw(c3959.39,2400.11) 3959.39,2445.07 ; R3.2@3927.6,2431.9 cw(c3959.39,2400.11) 3959.39,2445.07 ; R3.2@3927.6,2431.9 cw(c3959.39,2400.11) 3959.39,2445.07 ; R3.2@3927.6,2458.23 ccw(c3959.39,2490.02) 3959.39,2445.07 ; R3.2@3927.6,2458.23 ccw(c3959.39,2490.02) 3959.39,2445.07 ; R3.2@3927.6,2458.23 ccw(c3959.39,2490.02) 3959.39,2445.07 ; 4101.87,2389.13 ccw(c4155.5,2442.77) S1.6@4155.5,2366.92 ; 4101.87,2389.13 cw(c4048.23,2335.5) S1.6@4124.08,2335.5 ; 4101.87,2389.13 ccw(c4155.5,2442.77) S1.6@4155.5,2366.92 ; 4101.87,2389.13 cw(c4048.23,2335.5) S1.6@4124.08,2335.5 ; 4101.87,2389.13 ccw(c4155.5,2442.77) S1.6@4155.5,2366.92 ; 4101.87,2389.13 cw(c4048.23,2335.5) S1.6@4124.08,2335.5 ; 4112.88,2377.3 ccw(c4167.03,2391.81) S1.6@4155.78,2336.89 ; 4112.88,2377.3 ccw(c4167.03,2391.81) S1.6@4155.78,2336.89 ; 4112.88,2377.3 ccw(c4167.03,2391.81) S1.6@4155.78,2336.89 ; 4113.7,2378.12 cw(c4099.19,2323.97) S1.6@4154.11,2335.22 ; 4113.7,2378.12 cw(c4099.19,2323.97) S1.6@4154.11,2335.22 ; 4113.7,2378.12 cw(c4099.19,2323.97) S1.6@4154.11,2335.22 ; 4117.07,2361.67 ccw(c4163.4,2374.08) S1.6@4153.78,2327.09 ; 4117.07,2361.67 ccw(c4163.4,2374.08) S1.6@4153.78,2327.09 ; 4117.07,2361.67 ccw(c4163.4,2374.08) S1.6@4153.78,2327.09 ; 4118.94,2372.06 ccw(c4155.5,2408.62) S1.6@4155.5,2356.92 ; 4118.94,2372.06 cw(c4082.38,2335.5) S1.6@4134.08,2335.5 ; 4118.94,2372.06 ccw(c4155.5,2408.62) S1.6@4155.5,2356.92 ; 4118.94,2372.06 cw(c4082.38,2335.5) S1.6@4134.08,2335.5 ; 4118.94,2372.06 ccw(c4137.94,2391.13) S1.6@4146.04,2365.46 ; 4118.94,2372.06 cw(c4100.05,2353.11) S1.6@4125.56,2345.01 ; 4118.94,2372.06 ccw(c4137.89,2390.95) S1.6@4145.99,2365.44 ; 4118.94,2372.06 cw(c4099.87,2353.06) S1.6@4125.54,2344.96 ; 4118.94,2372.06 ccw(c4137.89,2390.95) S1.6@4145.99,2365.44 ; 4118.94,2372.06 cw(c4099.88,2353.06) S1.6@4125.54,2344.96 ; 4118.94,2372.06 ccw(c4137.85,2390.76) S1.6@4145.94,2365.43 ; 4118.94,2372.06 ccw(c4137.89,2390.95) S1.6@4145.99,2365.44 ; 4118.94,2372.06 cw(c4099.87,2353.06) S1.6@4125.54,2344.96 ; 4118.94,2372.06 ccw(c4137.89,2390.95) S1.6@4145.99,2365.44 ; 4118.94,2372.06 cw(c4099.87,2353.06) S1.6@4125.54,2344.96 ; 4118.94,2372.06 cw(c4100.24,2353.15) S1.6@4125.57,2345.06 ; 4118.94,2372.06 ccw(c4137.94,2391.12) S1.6@4146.04,2365.46 ; 4118.94,2372.06 cw(c4100.05,2353.11) S1.6@4125.56,2345.01 ; 4118.94,2372.06 ccw(c4137.94,2391.13) S1.6@4146.04,2365.46 ; 4118.94,2372.06 cw(c4100.05,2353.11) S1.6@4125.56,2345.01 ; 4118.94,2372.06 ccw(c4137.94,2391.13) S1.6@4146.04,2365.46 ; 4118.94,2372.06 cw(c4100.05,2353.11) S1.6@4125.56,2345.01 ; 4118.94,2372.06 ccw(c4155.5,2408.62) S1.6@4155.5,2356.92 ; 4118.94,2372.06 cw(c4082.38,2335.5) S1.6@4134.08,2335.5 ; 4119.08,2371.92 ccw(c4137.84,2390.74) S1.6@4145.94,2365.43 ; 4119.08,2371.92 cw(c4100.43,2353.2) S1.6@4125.59,2345.11 ; 4119.08,2371.92 ccw(c4137.8,2390.57) S1.6@4145.89,2365.41 ; 4119.08,2371.92 cw(c4100.26,2353.16) S1.6@4125.57,2345.06 ; 4119.08,2371.92 ccw(c4137.8,2390.57) S1.6@4145.89,2365.41 ; 4119.08,2371.92 cw(c4100.26,2353.16) S1.6@4125.57,2345.06 ; 4119.08,2371.92 cw(c4100.06,2353.11) S1.6@4125.56,2345.01 ; 4119.08,2371.92 ccw(c4137.8,2390.57) S1.6@4145.89,2365.41 ; 4119.08,2371.92 cw(c4100.26,2353.16) S1.6@4125.57,2345.06 ; 4119.08,2371.92 ccw(c4137.8,2390.57) S1.6@4145.89,2365.41 ; 4119.08,2371.92 cw(c4100.26,2353.16) S1.6@4125.57,2345.06 ; 4119.08,2371.92 ccw(c4137.89,2390.94) S1.6@4145.99,2365.44 ; 4119.08,2371.92 ccw(c4137.85,2390.74) S1.6@4145.94,2365.43 ; 4119.08,2371.92 cw(c4100.43,2353.2) S1.6@4125.59,2345.11 ; 4119.08,2371.92 ccw(c4137.84,2390.74) S1.6@4145.94,2365.43 ; 4119.08,2371.92 cw(c4100.43,2353.2) S1.6@4125.59,2345.11 ; 4119.08,2371.92 ccw(c4137.84,2390.74) S1.6@4145.94,2365.43 ; 4119.08,2371.92 cw(c4100.43,2353.2) S1.6@4125.59,2345.11 ; 4120.25,2369.7 ccw(c4143.87,2382.21) S1.6@4150.32,2356.28 ; 4120.25,2369.7 ccw(c4143.87,2382.21) S1.6@4150.32,2356.28 ; 4120.25,2369.7 ccw(c4143.87,2382.21) S1.6@4150.32,2356.28 ; 4121.3,2370.75 cw(c4108.79,2347.13) S1.6@4134.72,2340.68 ; 4121.3,2370.75 cw(c4108.79,2347.13) S1.6@4134.72,2340.68 ; 4121.3,2370.75 cw(c4108.79,2347.13) S1.6@4134.72,2340.68 ; 4123.73,2363.15 cw(c4102.37,2351.84) S1.6@4125.47,2344.73 ; 4123.73,2363.15 cw(c4102.37,2351.84) S1.6@4125.47,2344.73 ; 4123.73,2363.15 cw(c4102.37,2351.84) S1.6@4125.47,2344.73 ; 4126.24,2358.41 ccw(c4147.05,2369.43) S1.6@4152.74,2346.58 ; 4126.24,2358.41 ccw(c4147.05,2369.43) S1.6@4152.74,2346.58 ; 4126.24,2358.41 ccw(c4147.05,2369.43) S1.6@4152.74,2346.58 ; 4127.85,2367.27 ccw(c4139.16,2388.63) S1.6@4146.27,2365.53 ; 4127.85,2367.27 ccw(c4139.16,2388.63) S1.6@4146.27,2365.53 ; 4127.85,2367.27 ccw(c4139.16,2388.63) S1.6@4146.27,2365.53 ; 4129.33,2373.93 cw(c4116.92,2327.6) S1.6@4163.91,2337.22 ; 4129.33,2373.93 cw(c4116.92,2327.6) S1.6@4163.91,2337.22 ; 4129.33,2373.93 cw(c4116.92,2327.6) S1.6@4163.91,2337.22 ; 4132.59,2364.76 cw(c4121.57,2343.95) S1.6@4144.42,2338.26 ; 4132.59,2364.76 cw(c4121.57,2343.95) S1.6@4144.42,2338.26 ; 4132.59,2364.76 cw(c4121.57,2343.95) S1.6@4144.42,2338.26
NetV-_1: V-.1 V-.2
SENSE/FB: S1.3 U1.3 | length 2937.9
  Top Layer w10: U1.3 3485.5,2105.5 ; S1.3@3950.5,2105.5 S1.3@3955.5,2110.5 ; S1.3 3925.5,2105.5 ; 3925.5,2105.5 ccw(c3916.35,2114.65) S1.3@3927.77,2120.73 ; 3925.5,2105.5 cw(c3934.65,2096.35) S1.3@3940.73,2107.77 ; 3925.5,2105.5 ccw(c3916.35,2114.65) S1.3@3927.77,2120.73 ; 3925.5,2105.5 cw(c3934.65,2096.35) S1.3@3940.73,2107.77 ; 3925.5,2105.5 ccw(c3916.35,2114.65) S1.3@3927.77,2120.73 ; 3925.5,2105.5 cw(c3934.65,2096.35) S1.3@3940.73,2107.77 ; 3925.5,2105.5 ccw(c3916.35,2114.65) S1.3@3927.77,2120.73 ; 3925.5,2105.5 cw(c3934.65,2096.35) S1.3@3940.73,2107.77
  Top Layer w20: 3485.5,2105.5 3925.5,2105.5 ; 3819.3,2105.5 ccw(c3819.3,2271.7) S1.3@3936.82,2154.18 ; 3819.3,2105.5 ccw(c3819.3,2271.7) S1.3@3936.82,2154.18 ; 3819.3,2105.5 ccw(c3819.3,2271.7) S1.3@3936.82,2154.18 ; 3819.3,2105.5 ccw(c3819.3,2271.7) S1.3@3936.82,2154.18 ; 3867.58,2105.5 ccw(c3867.58,2223.42) S1.3@3950.96,2140.04 ; 3867.58,2105.5 ccw(c3867.58,2223.42) S1.3@3950.96,2140.04 ; 3867.58,2105.5 ccw(c3867.58,2223.42) S1.3@3950.96,2140.04 ; 3867.58,2105.5 ccw(c3867.58,2223.42) S1.3@3950.96,2140.04 ; 3877.12,2119.08 cw(c3904.98,2071.7) S1.3@3939.1,2114.79 ; 3877.12,2119.08 cw(c3904.98,2071.7) S1.3@3939.1,2114.79 ; 3877.12,2119.08 cw(c3904.98,2071.7) S1.3@3939.1,2114.79 ; 3877.12,2119.08 cw(c3904.98,2071.7) S1.3@3939.1,2114.79 ; 3877.12,2119.08 cw(c3904.98,2071.7) S1.3@3939.1,2114.79 ; 3877.12,2119.08 cw(c3904.98,2071.7) S1.3@3939.1,2114.79 ; 3901.2,2111.31 cw(c3922.94,2073.66) S1.3@3943.19,2112.13 ; 3901.2,2111.31 cw(c3922.94,2073.66) S1.3@3943.19,2112.13 ; 3901.2,2111.31 cw(c3922.94,2073.66) S1.3@3943.19,2112.13 ; 3901.2,2111.31 cw(c3922.94,2073.66) S1.3@3943.19,2112.13 ; 3901.2,2111.31 cw(c3922.94,2073.66) S1.3@3943.19,2112.13 ; 3901.2,2111.31 cw(c3922.94,2073.66) S1.3@3943.19,2112.13 ; 3902.29,2133.88 cw(c3924.42,2096.24) S1.3@3951.52,2130.47 ; 3902.29,2133.88 cw(c3924.42,2096.24) S1.3@3951.52,2130.47 ; 3902.29,2133.88 cw(c3924.42,2096.24) S1.3@3951.52,2130.47 ; 3902.29,2133.88 cw(c3924.42,2096.24) S1.3@3951.52,2130.47 ; 3902.29,2133.88 cw(c3924.42,2096.24) S1.3@3951.52,2130.47 ; 3902.29,2133.88 cw(c3924.42,2096.24) S1.3@3951.52,2130.47 ; 3910.13,2116.46 ccw(c3888.82,2153.37) S1.3@3929.98,2142.34 ; 3910.13,2116.46 ccw(c3888.82,2153.37) S1.3@3929.98,2142.34 ; 3910.13,2116.46 ccw(c3888.82,2153.37) S1.3@3929.98,2142.34 ; 3910.13,2116.46 ccw(c3888.82,2153.37) S1.3@3929.98,2142.34 ; 3910.13,2116.46 ccw(c3888.82,2153.37) S1.3@3929.98,2142.34 ; 3910.13,2116.46 ccw(c3888.82,2153.37) S1.3@3929.98,2142.34 ; 3915.87,2105.5 ccw(c3915.87,2175.13) S1.3@3965.1,2125.9 ; 3915.87,2105.5 ccw(c3915.87,2175.13) S1.3@3965.1,2125.9 ; 3915.87,2105.5 ccw(c3915.87,2175.13) S1.3@3965.1,2125.9 ; 3915.87,2105.5 ccw(c3915.87,2175.13) S1.3@3965.1,2125.9
VIN+: B1.4 C1.1 C2.2 C19.1 C20.1 D2.2 S1.5 U1.13 U1.15 U1.16 U3.3 | length 3919.1
  Top Layer w10: C1.1@3065.5,2015.5 3065.5,2090.5 3090.5,2115.5 3220.5,2115.5 3230.5,2105.5 U1.13 ; v2(4285,2775) 4375.28,2775 U3.3
  Top Layer w50: 2865.5,2015.5 3265.5,2015.5 ; 3136.09,2015.5 cw(c3136.09,1966.05) C2.2@3171.06,2001.02 ; 3136.09,2015.5 cw(c3136.09,1966.05) C2.2@3171.06,2001.02 ; 3136.09,2015.5 cw(c3136.09,1966.05) C2.2@3171.06,2001.02 ; 3136.09,2015.5 cw(c3136.09,1966.05) C2.2@3171.06,2001.02 ; C2.2@3189.94,2001.02 cw(c3224.91,1966.05) 3224.91,2015.5 ; C2.2@3189.94,2001.02 cw(c3224.91,1966.05) 3224.91,2015.5 ; C2.2@3189.94,2001.02 cw(c3224.91,1966.05) 3224.91,2015.5 ; C2.2@3189.94,2001.02 cw(c3224.91,1966.05) 3224.91,2015.5
  Bottom Layer w10: D2.2 2875.5,2155.5 2875.5,2565.5 2955.5,2645.5 4155.5,2645.5 ; D2.2@2810,2102.56 ccw(c2810,2132.88) 2831.44,2111.44 ccw(c2852.88,2090) D2.2@2822.56,2090 ; D2.2@2810,2112.56 ccw(c2810,2167.02) 2848.51,2128.51 ccw(c2887.02,2090) D2.2@2832.56,2090 ; S1.5 4220.5,2235.5 ; S1.5@4172.28,2222.2 cw(c4199.81,2200.38) 4199.81,2235.5 cw(c4199.81,2270.62) S1.5@4172.28,2248.8 ; S1.5@4180.12,2215.98 cw(c4220.5,2183.97) 4220.5,2235.5 ; S1.5@4180.12,2255.02 ccw(c4220.5,2287.03) 4220.5,2235.5 ; v2(4285,2775) 4155.5,2645.5 ; 4155.5,2645.5 4265.5,2535.5 4265.5,2280.5 4220.5,2235.5
VIN-: B1.1 C21.2 C22.2 D3.1
VOUT+: C4.2 C5.2 C6.2 C7.2 C8.2 C9.2 P5.1 P6.1 R1.2 S1.2 U1.1 U1.20 V+.1 V+.2 V+.3 V+.4 V+.5 V+.6 V+.7 V+.8 | length 5036.9
  Top Layer w20: S1.2 4035.5,2155.5 4035.5,2050.5 4065.5,2020.5 ; S1.2@3955.5,2209.08 cw(c3955.5,2145.31) 4000.6,2190.4 ; S1.2@3955.5,2209.08 cw(c3955.5,2145.31) 4000.6,2190.4 ; S1.2@3955.5,2209.08 cw(c3955.5,2145.31) 4000.6,2190.4 ; S1.2@3955.5,2209.08 cw(c3955.5,2145.31) 4000.6,2190.4 ; S1.2@3981.92,2235.5 ccw(c4045.69,2235.5) 4000.6,2190.4 ; S1.2@3981.92,2235.5 ccw(c4045.69,2235.5) 4000.6,2190.4 ; S1.2@3981.92,2235.5 ccw(c4045.69,2235.5) 4000.6,2190.4 ; S1.2@3981.92,2235.5 ccw(c4045.69,2235.5) 4000.6,2190.4
  Top Layer w50: 3455.5,2015.5 4380.5,2015.5 ; 3709.72,2015.5 cw(c3709.72,1969.09) C7.2@3742.54,2001.91 ; C7.2@3748.46,2001.91 cw(c3781.28,1969.09) 3781.28,2015.5 ; 3814.72,2015.5 cw(c3814.72,1969.09) C8.2@3847.54,2001.91 ; C8.2@3853.46,2001.91 cw(c3886.28,1969.09) 3886.28,2015.5 ; 3919.72,2015.5 cw(c3919.72,1969.09) C9.2@3952.54,2001.91 ; C9.2@3958.46,2001.91 cw(c3991.28,1969.09) 3991.28,2015.5 ; 3499.72,2015.5 cw(c3499.72,1969.09) C5.2@3532.54,2001.91 ; 3499.72,2015.5 cw(c3499.72,1969.09) C5.2@3532.54,2001.91 ; 3499.72,2015.5 cw(c3499.72,1969.09) C5.2@3532.54,2001.91 ; 3499.72,2015.5 cw(c3499.72,1969.09) C5.2@3532.54,2001.91 ; C5.2@3538.46,2001.91 cw(c3571.28,1969.09) 3571.28,2015.5 ; C5.2@3538.46,2001.91 cw(c3571.28,1969.09) 3571.28,2015.5 ; C5.2@3538.46,2001.91 cw(c3571.28,1969.09) 3571.28,2015.5 ; C5.2@3538.46,2001.91 cw(c3571.28,1969.09) 3571.28,2015.5 ; 3604.72,2015.5 cw(c3604.72,1969.09) C6.2@3637.54,2001.91 ; 3604.72,2015.5 cw(c3604.72,1969.09) C6.2@3637.54,2001.91 ; 3604.72,2015.5 cw(c3604.72,1969.09) C6.2@3637.54,2001.91 ; 3604.72,2015.5 cw(c3604.72,1969.09) C6.2@3637.54,2001.91 ; C6.2@3643.46,2001.91 cw(c3676.28,1969.09) 3676.28,2015.5 ; C6.2@3643.46,2001.91 cw(c3676.28,1969.09) 3676.28,2015.5 ; C6.2@3643.46,2001.91 cw(c3676.28,1969.09) 3676.28,2015.5 ; C6.2@3643.46,2001.91 cw(c3676.28,1969.09) 3676.28,2015.5 ; 3704.72,2015.5 cw(c3704.72,1969.09) C7.2@3737.54,2001.91 ; 3704.72,2015.5 cw(c3704.72,1969.09) C7.2@3737.54,2001.91 ; 3704.72,2015.5 cw(c3704.72,1969.09) C7.2@3737.54,2001.91 ; C7.2@3743.46,2001.91 cw(c3776.28,1969.09) 3776.28,2015.5 ; C7.2@3743.46,2001.91 cw(c3776.28,1969.09) 3776.28,2015.5 ; C7.2@3743.46,2001.91 cw(c3776.28,1969.09) 3776.28,2015.5 ; 3809.72,2015.5 cw(c3809.72,1969.09) C8.2@3842.54,2001.91 ; 3809.72,2015.5 cw(c3809.72,1969.09) C8.2@3842.54,2001.91 ; 3809.72,2015.5 cw(c3809.72,1969.09) C8.2@3842.54,2001.91 ; C8.2@3848.46,2001.91 cw(c3881.28,1969.09) 3881.28,2015.5 ; C8.2@3848.46,2001.91 cw(c3881.28,1969.09) 3881.28,2015.5 ; C8.2@3848.46,2001.91 cw(c3881.28,1969.09) 3881.28,2015.5 ; 3914.72,2015.5 cw(c3914.72,1969.09) C9.2@3947.54,2001.91 ; 3914.72,2015.5 cw(c3914.72,1969.09) C9.2@3947.54,2001.91 ; 3914.72,2015.5 cw(c3914.72,1969.09) C9.2@3947.54,2001.91 ; C9.2@3953.46,2001.91 cw(c3986.28,1969.09) 3986.28,2015.5 ; C9.2@3953.46,2001.91 cw(c3986.28,1969.09) 3986.28,2015.5 ; C9.2@3953.46,2001.91 cw(c3986.28,1969.09) 3986.28,2015.5 ; 4263.76,2015.5 ccw(c4263.76,2052.71) C4.2@4290.07,2026.4 ; 4263.76,2015.5 ccw(c4263.76,2052.71) C4.2@4290.07,2026.4 ; 4263.76,2015.5 ccw(c4263.76,2052.71) C4.2@4290.07,2026.4 ; 4263.76,2015.5 ccw(c4263.76,2052.71) C4.2@4290.07,2026.4 ; C4.2@4280.93,2026.4 ccw(c4307.24,2052.71) 4307.24,2015.5 ; C4.2@4280.93,2026.4 ccw(c4307.24,2052.71) 4307.24,2015.5 ; C4.2@4280.93,2026.4 ccw(c4307.24,2052.71) 4307.24,2015.5 ; C4.2@4280.93,2026.4 ccw(c4307.24,2052.71) 4307.24,2015.5 ; R1.2@4339.94,2015.5 ccw(c4339.94,2043.97) R1.2@4360.07,2023.84 ; R1.2@4339.94,2015.5 ccw(c4339.94,2043.97) R1.2@4360.07,2023.84 ; R1.2@4339.94,2015.5 ccw(c4339.94,2043.97) R1.2@4360.07,2023.84 ; R1.2@4339.94,2015.5 ccw(c4339.94,2043.97) R1.2@4360.07,2023.84 ; R1.2@4350.93,2023.84 ccw(c4371.06,2043.97) R1.2@4371.06,2015.5 ; R1.2@4350.93,2023.84 ccw(c4371.06,2043.97) R1.2@4371.06,2015.5 ; R1.2@4350.93,2023.84 ccw(c4371.06,2043.97) R1.2@4371.06,2015.5 ; R1.2@4350.93,2023.84 ccw(c4371.06,2043.97) R1.2@4371.06,2015.5
  Bottom Layer w10: P5.1 4690,3125 P6.1
  Bottom Layer w25: V+.1@4758.46,1822.54 ccw(c4729.39,1851.61) 4770.5,1851.61 ccw(c4811.61,1851.61) V+.1@4782.54,1822.54 ; V+.1 4770.5,2905.5 P6.1
VOUT-: C13.2 C14.2 C15.2 C16.2 C17.2 C18.2 P6.3 R4.2 U2.1 U2.20 | length 2830.2
  Top Layer w20: C15.2@3620.6,1481.43 3620.6,1527.84 ccw(c3686.54,1527.84) C15.2@3645.12,1476.53 ; C15.2@3620.6,1485.99 ccw(c3652.75,1485.99) C15.2@3632.56,1460.97 ; 3680.5,1481.84 C13.2
  Top Layer w25: 4770.5,1602.53 ccw(c4770.5,1679.85) 4839.62,1645.19 ; P6.3@4830,2765 P6.3 ; 4840,1645 P6.3@4840,2765
  Top Layer w50: 3445.5,1480.5 3535.42,1480.98 3620.6,1481.43 3640.42,1481.53 3680.5,1481.74 3745.41,1482.09 3850.41,1482.64 3955.41,1483.2 4390.5,1485.5 ; 3498.54,1480.78 cw(c3498.8,1432.82) C14.2@3532.53,1466.91 ; C14.2@3538.46,1466.9 cw(c3572.65,1433.07) 3572.4,1481.17 ; 3602.2,1481.33 cw(c3602.46,1431.47) C15.2@3637.53,1466.91 ; 3705.86,1481.88 cw(c3706.13,1430.12) C16.2@3742.53,1466.91 ; C16.2@3748.46,1466.9 cw(c3785.35,1430.4) 3785.07,1482.3 ; 3809.51,1482.43 cw(c3809.8,1428.77) C17.2@3847.53,1466.91 ; C17.2@3853.46,1466.9 cw(c3891.7,1429.07) 3891.41,1482.86 ; 3913.17,1482.97 cw(c3913.46,1427.43) C18.2@3952.53,1466.91 ; C18.2@3958.46,1466.9 cw(c3998.04,1427.73) 3997.75,1483.42 ; C15.2@3643.46,1466.9 cw(c3679,1431.73) 3678.74,1481.73 ; C15.2@3643.46,1466.9 cw(c3679,1431.73) 3678.74,1481.73 ; C15.2@3643.46,1466.9 cw(c3679,1431.73) 3678.74,1481.73
pads on no net: "AC IN.1" "AC IN.2" "AC IN.3" "AC IN.4" S1.4 U1.2 U1.17 U1.18 U1.19 U1.V U1.V_2 U1.V_3 U1.V_4 U1.V_5 U1.V_6 U1.V_7 U1.V_8 U1.V_9 U1.V_10 U1.V_11 U1.V_12 U1.V_13 U1.V_14 U1.V_15 U1.V_16 U2.2 U2.4 U2.5 U2.6 U2.8 U2.9 U2.10 U2.11 U2.12 U2.17 U2.18 U2.19 U2.V U2.V_2 U2.V_3 U2.V_4 U2.V_5 U2.V_6 U2.V_7 U2.V_8 U2.V_9 U2.V_10 U2.V_11 U2.V_12 U2.V_13 U2.V_14 U2.V_15 U2.V_16 V-.3 V-.4 V-.5 V-.6 V-.7 V-.8
copper on no net:
  other v1: 1122.01,1122.01 4815,1122.01 1430,3730 3720,3730 1122.01,4815 4815,4815
  other v2: 4835,1115

## Polygon pours and split planes (outlines as drawn)
GND on Top Layer "Top Layer-No Net" (solid, pour order 17): 1000,3285 1000,1000 4937.01,1000 4937.01,3285
NetB1_2 on Top Layer "Bottom Layer-No Net" (solid, pour order 18): 2695,3010 2695,2905 2775.86,2905 ccw(c2775.86,2939.14) 2800,2915 ccw(c2751.72,2963.28) 2820,2963.28 2820,3055 2820,3078.58 ccw(c2720,3078.58) 2790.71,3149.29 2745,3195 ccw(c2708.79,3158.79) 2708.79,3210 2500,3210 1366.42,3210 ccw(c1366.42,3110) 1295.71,3180.71 1255,3140 1255,3085
VOUT+ on Top Layer "Bottom Layer-No Net" (solid, pour order 2): 4776.06,1770 4043.59,1770 4000.5,1815.08 4000.5,2005.44 4330.83,2005.44 4364.34,2040.5 4570.2,2040.5 4656.38,2040.5 4800,1890.22 4800,1790.04
VOUT- on Top Layer "Bottom Layer-No Net" (solid, pour order 4): 3695.5,1505.5 3875.5,1505.5 4025.5,1655.5 4810.5,1655.5 4815.5,1655.5 4835.5,1635.5 4835.5,1565.5 4770.5,1500.5 4730.5,1460.5 4275.5,1460.5
VOUT- on Top Layer "Bottom Layer-No Net" (solid, pour order 6): 4030.5,1650.5 4030.5,1647.42 3901.68,1518.6 3888.58,1505.5 3670.5,1505.5
VIN- on Top Layer "Bottom Layer-No Net" (solid, pour order 10): 2955,1505 2955,1450 2764.29,1259.29 cw(c2693.58,1330) 2693.58,1230 2340,1230 1351.42,1230 cw(c1351.42,1330) 1280.71,1259.29 1145,1395 1144.29,1395.71 cw(c1215,1466.42) 1115,1466.42 1115,1530
NetB1_2 on Top Layer "Bottom Layer-No Net" (solid, pour order 20): 1255,3085 1255,2925 ccw(c1303.28,2925) 1269.14,2890.86 1270,2890 ccw(c1294.14,2914.14) 1294.14,2880 1340,2880 ccw(c1340,2964.5) 1399.75,2904.75 1400,2905 ccw(c1375.86,2929.14) 1410,2929.14 1410,3010 cw(c1494.5,3010) 1434.75,3069.75 1440,3075
VIN+ on Top Layer "Bottom Layer-No Net" (solid, pour order 28): 1380,2535 cw(c1452.43,2535) 1401.21,2586.21 1535,2720 1600.71,2785.71 ccw(c1530,2856.42) 1630,2856.42 1630,2965 cw(c1690.36,2965) 1647.68,3007.68 1655,3015 cw(c1679.14,2990.86) 1679.14,3025 1725,3025 1738.58,3025 cw(c1738.58,2925) 1809.29,2995.71 1810,2995 cw(c1785.86,2970.86) 1820,2970.86 1820,2855 1820,2851.42 ccw(c1920,2851.42) 1849.29,2780.71 1910,2720 1965.71,2664.29 ccw(c2036.42,2735) 2036.42,2635 2345,2635 2348.58,2635 cw(c2348.58,2535) 2419.29,2605.71 2505,2520 cw(c2444.64,2459.64) 2530,2459.64 2530,2360 ccw(c2578.28,2360) 2544.14,2325.86 2625,2245 2675.71,2194.29 ccw(c2746.42,2265) 2746.42,2165 2805,2165 cw(c2805,2068.43) 2873.28,2136.72 2895,2115 cw(c2870.86,2090.86) 2905,2090.86 2905,1990 2746.42,1990 cw(c2746.42,2090) 2675.71,2019.29 2605,2090 2370,2260 2055,2395 1465,2410 1390,2445 1375,2485
VIN- on Top Layer "Bottom Layer-No Net" (solid, pour order 32): 1005,2995 1085,3070 cw(c1121.21,3033.79) 1121.21,3085 1155,3085 cw(c1155,3036.72) 1189.14,3070.86 1205,3055 cw(c1144.64,2994.64) 1230,2994.64 1230,2945 1230,1711.42 ccw(c1330,1711.42) 1259.29,1640.71 1380,1520 1222.31,1362.31 cw(c1190.76,1393.86) 1190.76,1349.24 1005,1535
GND on Top Layer "Bottom Layer-No Net" (solid, pour order 42): 4937.01,3325 1000,3325 1000,4937.01 4937.01,4937.01
GND on Bottom Layer "Top Layer-No Net" (solid, pour order 19): 1000,3285 1000,1000 4937.01,1000 4937.01,3285
NetB1_3 on Bottom Layer "Bottom Layer-No Net" (solid, pour order 24): 2510,2905 2560,2905 ccw(c2560,2917.07) 2568.54,2908.54 2575,2915 ccw(c2550.86,2939.14) 2585,2939.14 2585,2965 2585,2978.58 ccw(c2485,2978.58) 2555.71,3049.29 2545,3060 2429.29,3175.71 ccw(c2358.58,3105) 2358.58,3205 1600,3205 1551.42,3205 ccw(c1551.42,3105) 1480.71,3175.71 1460,3155 ccw(c1472.07,3142.93) 1455,3142.93 1455,3055 2308.58,3055 cw(c2308.58,2955) 2379.29,3025.71 2485,2920
NetB1_3 on Bottom Layer "Bottom Layer-No Net" (solid, pour order 26): 1455,3110 1455,2955.36 ccw(c1540.36,2955.36) 1480,2895 ccw(c1504.14,2919.14) 1504.14,2885 1550,2885 ccw(c1550,2933.28) 1584.14,2899.14 1605,2920 ccw(c1580.86,2944.14) 1615,2944.14 1615,3085
GND on Bottom Layer "Bottom Layer-No Net" (solid, pour order 44): 1000,4937.01 1000,3325 4937.01,3325 4937.01,4937.01

## Keep-outs
Keep-Out Layer:
  lines w10: 1000,1000 1000,4937.01 4937.01,4937.01 4937.01,1000 1000,1000

## Other copper
Top Layer:
  rectangle net VIN+: 3245.5,1995.5 3285.5,2060.5
  rectangle net VIN+: 3250.5,1990.5 3325.5,2030.5
  rectangle net VOUT+: 3435.5,1990.5 3475.5,2060.5
  rectangle net VOUT+: 3395.5,1990.5 3455.5,2030.5
  rectangle net NetC10_1: 3250.5,1455.5 3325.5,1495.5
  rectangle net NetC10_1: 3245.5,1455.5 3285.5,1525.5
  rectangle net VOUT-: 3435.5,1455.5 3475.5,1520.5
  rectangle net VOUT-: 3395.5,1455.5 3475.5,1495.5
  rectangle net VOUT+: 4000.5,1890 4460,2040.5
  rectangle net VOUT-: 3600.5,1460.5 4505.5,1527.49
  rectangle net NetC10_1: 2885,1440 2945,1505
  rectangle net NetB1_2: 1255,3066.79 1430.82,3095
  rectangle net VIN+: 2824.65,1990 2905,2054.62
Bottom Layer:
  rectangle net GND: 3290,1495 3440,1645
  rectangle net GND: 3280,2040 3440,2180

## Silkscreen, mask and mechanical layers (free items; w line width, h text height)
Mechanical 1:
  lines w10: 1000.39,2875 4150,2875 4150,4937.01 ; 1000.39,3730 4150,3730 ; 1010,3295 4915,3295

## Text inside footprints (layer, text, board x,y; h text height)
C19: Top Overlay "+" at 1509.01,2655.15 h59.06 r90
C20: Top Overlay "+" at 2359.01,2655.15 h59.06 r90
C21: Top Overlay "+" at 1509.01,1795.15 h59.06 r90
C22: Top Overlay "+" at 2359.01,1795.15 h59.06 r90
U1: Top Overlay "*" at 3499.67,2026.52 h50 r180; Mechanical 1 "*" at 3499.67,2026.52 h50 r180
U2: Top Overlay "*" at 3499.67,1491.52 h50 r180; Mechanical 1 "*" at 3499.67,1491.52 h50 r180